# EAGLE board Task3 (EAGLE 9.5.1)
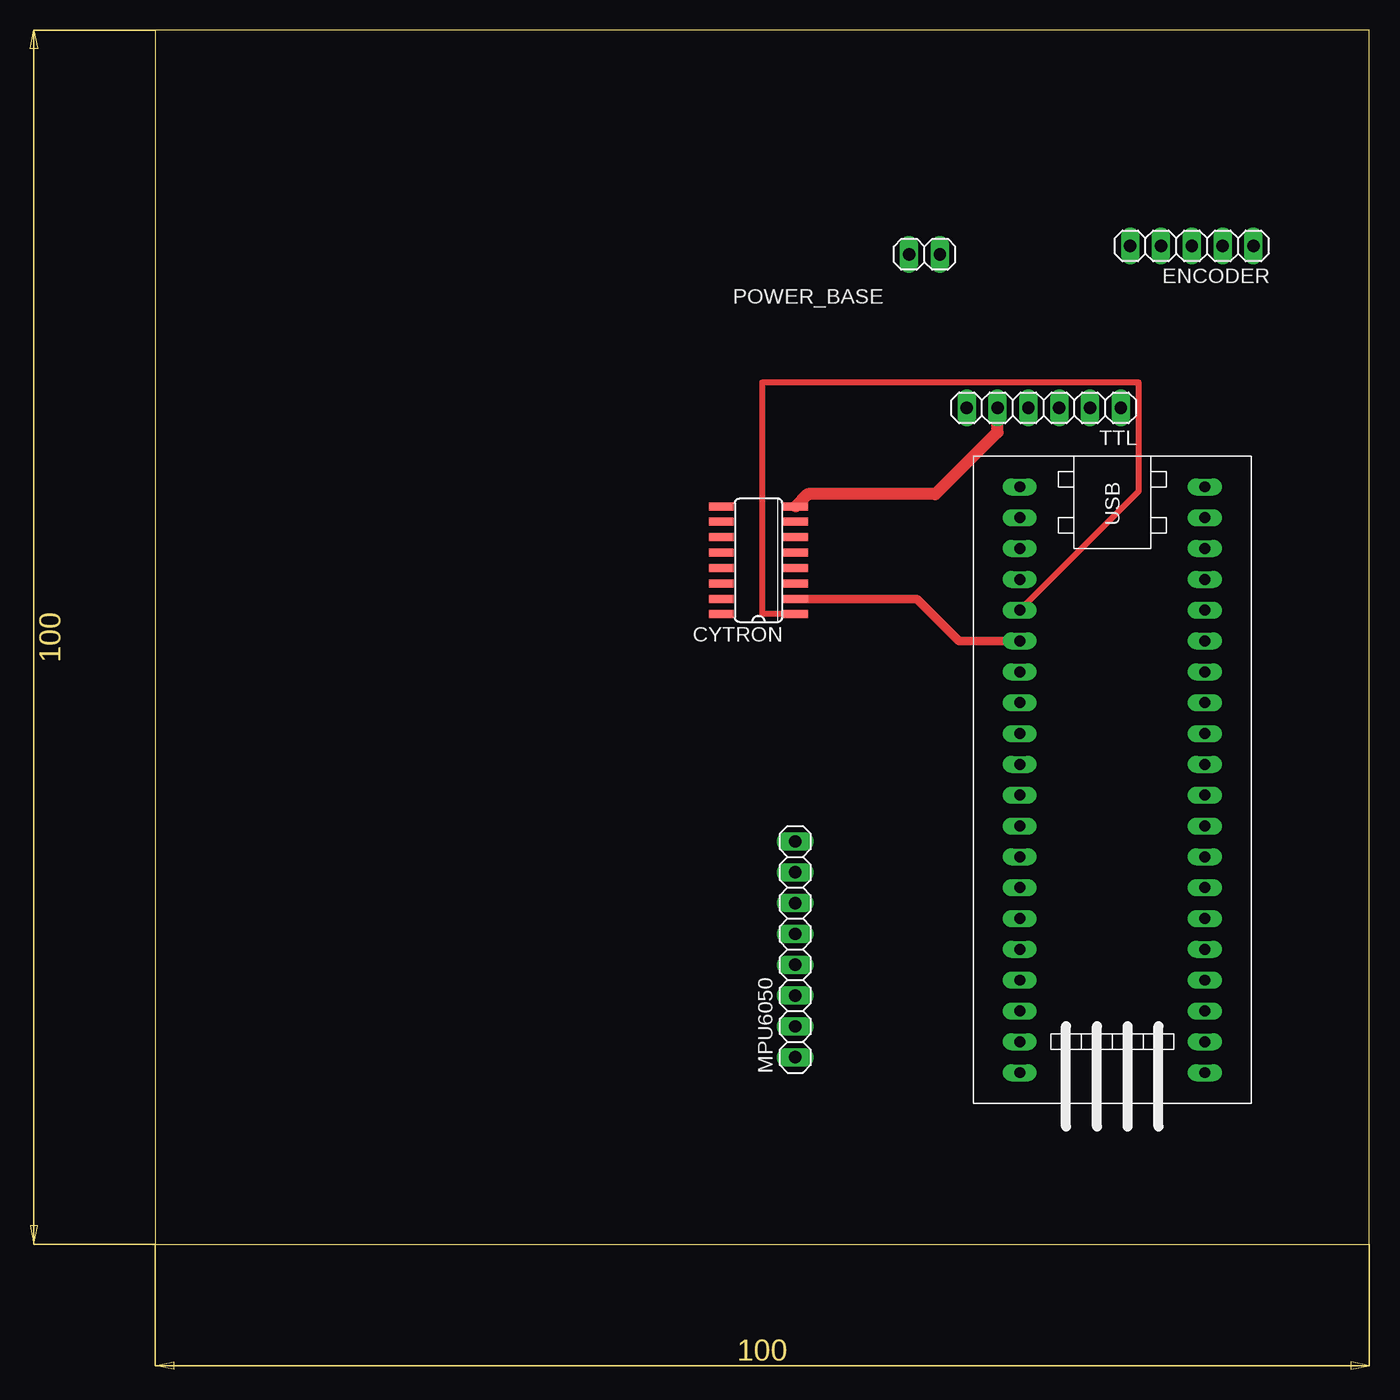
[diagram p0: board, top side]
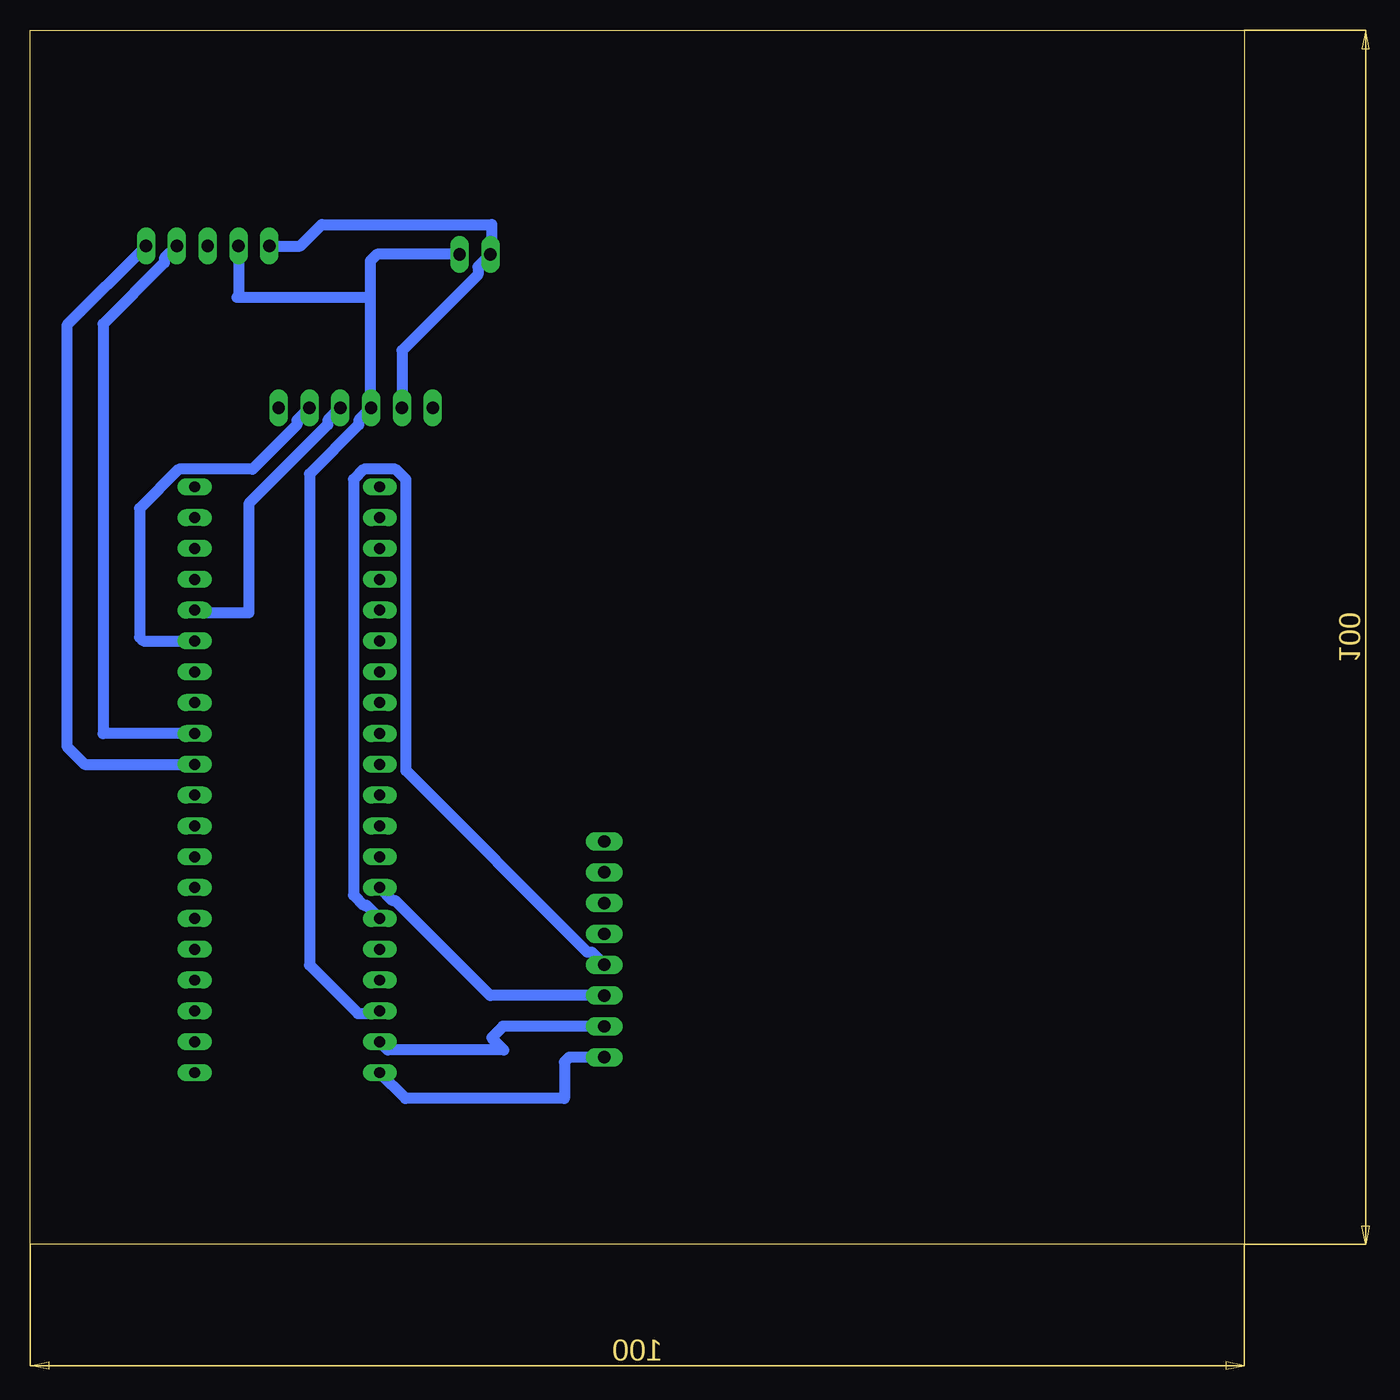
[diagram p1: board, bottom side, seen from below]

Size 100 x 100 mm. Coordinates in mm from the lower left corner, seen from the top.
Outline: 0,0 100,0 100,100 0,100 0,0
Copper layers (1*16): Top 0.035mm / dielectric 1.5mm / Bottom 0.035mm
Design rules "default *": minimum track width 6mil, minimum drill 0.8mm, track to track 0.6mm, track to pad 0.3mm, pad to pad 0.6mm, via to via 0.6mm, smd to smd 0.6mm, copper to edge 0.2mm, drill to drill 0.2mm, minimum pad ring 10mil, minimum via ring 8mil, stop-mask expansion 4mil, vias tented up to drill 0mil, thermal gap 10mil

## Footprints (pad centres in the part's own frame; a part is rotated, then mirrored left to right if it is on the bottom)
SO16 = smd 0.66 x 2.032: 1 -4.445,-3.073; 2 -3.175,-3.073; 3 -1.905,-3.073; 4 -0.635,-3.073; 5 0.635,-3.073; 6 1.905,-3.073; 7 3.175,-3.073; 8 4.445,-3.073; 9 4.445,3.073; 10 3.175,3.073; 11 1.905,3.073; 12 0.635,3.073; 13 -0.635,3.073; 14 -1.905,3.073; 15 -3.175,3.073; 16 -4.445,3.073
1X05 = drill 1.016 long: 1 -5.08,0; 2 -2.54,0; 3 0,0; 4 2.54,0; 5 5.08,0
1X08 = drill 1.016 long: 1 -8.89,0; 2 -6.35,0; 3 -3.81,0; 4 -1.27,0; 5 1.27,0; 6 3.81,0; 7 6.35,0; 8 8.89,0
1X02 = drill 1.016 long: 1 -1.27,0; 2 1.27,0
STM32F103C8T6-MODULE = drill 0.9 long: 3.3V_1 25.4,-7.62; 3.3V_2 -17.78,7.62; 5V 20.32,-7.62; GND_1 22.86,-7.62; GND_2 -20.32,7.62; GND_3 -22.86,7.62; PA_0 15.24,7.62; PA_1 12.7,7.62; PA_2 10.16,7.62; PA_3 7.62,7.62; PA_4 5.08,7.62; PA_5 2.54,7.62; PA_6 0,7.62; PA_7 -2.54,7.62; PA_8 -12.7,-7.62; PA_9 -10.16,-7.62; PA_10 -7.62,-7.62; PA_11 -5.08,-7.62; PA_12 -2.54,-7.62; PA_15 0,-7.62; PB_0 -5.08,7.62; PB_1 -7.62,7.62; PB_3 2.54,-7.62; PB_4 5.08,-7.62; PB_5 7.62,-7.62; PB_6 10.16,-7.62; PB_7 12.7,-7.62; PB_8 15.24,-7.62; PB_9 17.78,-7.62; PB_10 -10.16,7.62; PB_11 -12.7,7.62; PB_12 -22.86,-7.62; PB_13 -20.32,-7.62; PB_14 -17.78,-7.62; PB_15 -15.24,-7.62; PC_13 22.86,7.62; PC_14 20.32,7.62; PC_15 17.78,7.62; RESET -15.24,7.62; VB 25.4,7.62
1X06 = drill 1.016 long: 1 -6.35,0; 2 -3.81,0; 3 -1.27,0; 4 1.27,0; 5 3.81,0; 6 6.35,0

## Placement (x,y rotation side)
CYTRON  ULN2003AD  [SO16]  49.69,56.34 90 top
ENCODER  [1X05]  85.39,82.24 180 top
MPU6050  [1X08]  52.71,24.29 90 top
POWER_BASE  [1X02]  63.37,81.55 180 top
STM32  STM32F103C8T6-MODULE  [STM32F103C8T6-MODULE]  78.84,39.53 270 top
TTL  [1X06]  73.19,68.9 180 top

## Library data of the parts
CYTRON ENCODER MPU6050 POWER_BASE TTL = MIA-Training
STM32 = MIA_LIBRARY-2-2-2

## Nets
3.3V@1: MPU6050.1 STM32.3.3V_1
3.3V@2: STM32.3.3V_2
3V3: TTL.6
5: MPU6050.5
5V: ENCODER.4 POWER_BASE.1 STM32.5V TTL.4
6: MPU6050.6
7: MPU6050.7
8: MPU6050.8
CD+: CYTRON.9
DTR: TTL.1
GND: CYTRON.8 ENCODER.5 POWER_BASE.2 TTL.5
GND@1: MPU6050.2 STM32.GND_1
GND@2: STM32.GND_2
GND@3: STM32.GND_3
I3: CYTRON.3
I4: CYTRON.4
I5: CYTRON.5
I6: CYTRON.6
I7: CYTRON.7
N$3: ENCODER.3
O1: CYTRON.16
O2: CYTRON.15
O3: CYTRON.14
O4: CYTRON.13
O5: CYTRON.12
O6: CYTRON.11
O7: CYTRON.10
PA_0: STM32.PA_0
PA_1: STM32.PA_1
PA_2: STM32.PA_2
PA_3: STM32.PA_3
PA_4: STM32.PA_4
PA_5: STM32.PA_5
PA_6: ENCODER.1 STM32.PA_6
PA_7: ENCODER.2 STM32.PA_7
PA_8: CYTRON.1 STM32.PA_8
PA_9: CYTRON.2 STM32.PA_9
PA_10: STM32.PA_10
PA_11: STM32.PA_11
PA_12: STM32.PA_12
PA_15: STM32.PA_15
PB_0: STM32.PB_0
PB_1: STM32.PB_1
PB_3: STM32.PB_3
PB_4: STM32.PB_4
PB_5: STM32.PB_5
PB_6: MPU6050.3 STM32.PB_6
PB_7: MPU6050.4 STM32.PB_7
PB_8: STM32.PB_8
PB_9: STM32.PB_9
PB_10: STM32.PB_10 TTL.2
PB_11: STM32.PB_11 TTL.3
PB_12: STM32.PB_12
PB_13: STM32.PB_13
PB_14: STM32.PB_14
PB_15: STM32.PB_15
PC_13: STM32.PC_13
PC_14: STM32.PC_14
PC_15: STM32.PC_15
RESET: STM32.RESET
VB: STM32.VB

## Tracks (layer width: path | path; a pad name or v marks a point on that pad's centre or on a via)
3.3V@1
  Bottom 0.9: MPU6050.1 55.6,15.4 56,15 56,12 69.09,12 STM32.3.3V_1
5V
  Bottom 0.9: POWER_BASE.1 71.45,81.55 72,81 72,78 | 72,78 72,68.98 TTL.4 72.95,67.87 72.95,67.51 77,63.46 77,23 73,19 71.43,19 STM32.5V | ENCODER.4 82.85,78.15 83,78 72,78
GND
  Top 1: CYTRON.8 53.76,61.78 64.27,61.78 69.38,66.9 TTL.5
  Bottom 0.9: ENCODER.5 77.76,82.24 76,84 62,84 62,81.65 POWER_BASE.2 63.13,80.52 63.13,79.87 69.38,73.62 TTL.5
GND@1
  Bottom 0.9: MPU6050.2 61.06,17.94 62,17 61,16 70.55,16 STM32.GND_1
PA_6
  Bottom 0.9: ENCODER.1 97,75.71 97,41 95.53,39.53 STM32.PA_6
PA_7
  Bottom 0.9: STM32.PA_7 94,42.07 94,75.81 88.96,80.85 88.96,81.21 ENCODER.2
PA_8
  Top 0.5: CYTRON.1 50,51.9 50,71 81,71 81,62.01 STM32.PA_8
PA_9
  Top 0.7: CYTRON.2 62.75,53.16 66.22,49.69 STM32.PA_9
PB_6
  Bottom 0.9: STM32.PB_6 70.13,28.28 69.91,28.28 62.11,20.48 MPU6050.3
PB_7
  Bottom 0.9: MPU6050.4 53.74,24.05 54.1,24.05 69.06,39.01 69.06,62.99 69.91,63.84 72.53,63.84 73.38,62.99 73.38,28.77 72.53,27.92 72.31,27.92 STM32.PB_7
PB_10
  Bottom 0.9: TTL.2 78.03,67.87 78.03,67.51 81.7,63.84 87.77,63.84 91,60.61 91,50 90.69,49.69 STM32.PB_10
PB_11
  Bottom 0.9: TTL.3 75.49,67.87 75.49,67.51 82,61 82,52 86.23,52 STM32.PB_11